# Altium PCB PCB3.PcbDoc
Units mil, origin at the board's own origin, x right, y up, seen from the top; angles counter-clockwise.
Board outline 6000 x 4000 mil, 4 copper layers (Top Layer 1, Top Layer, Bottom Layer, Bottom Layer 1), stack 23.756 mil thick; 8 components, 6 nets, 56 pads, 0 vias.
Unrouted connection lines stored in the file: 10.
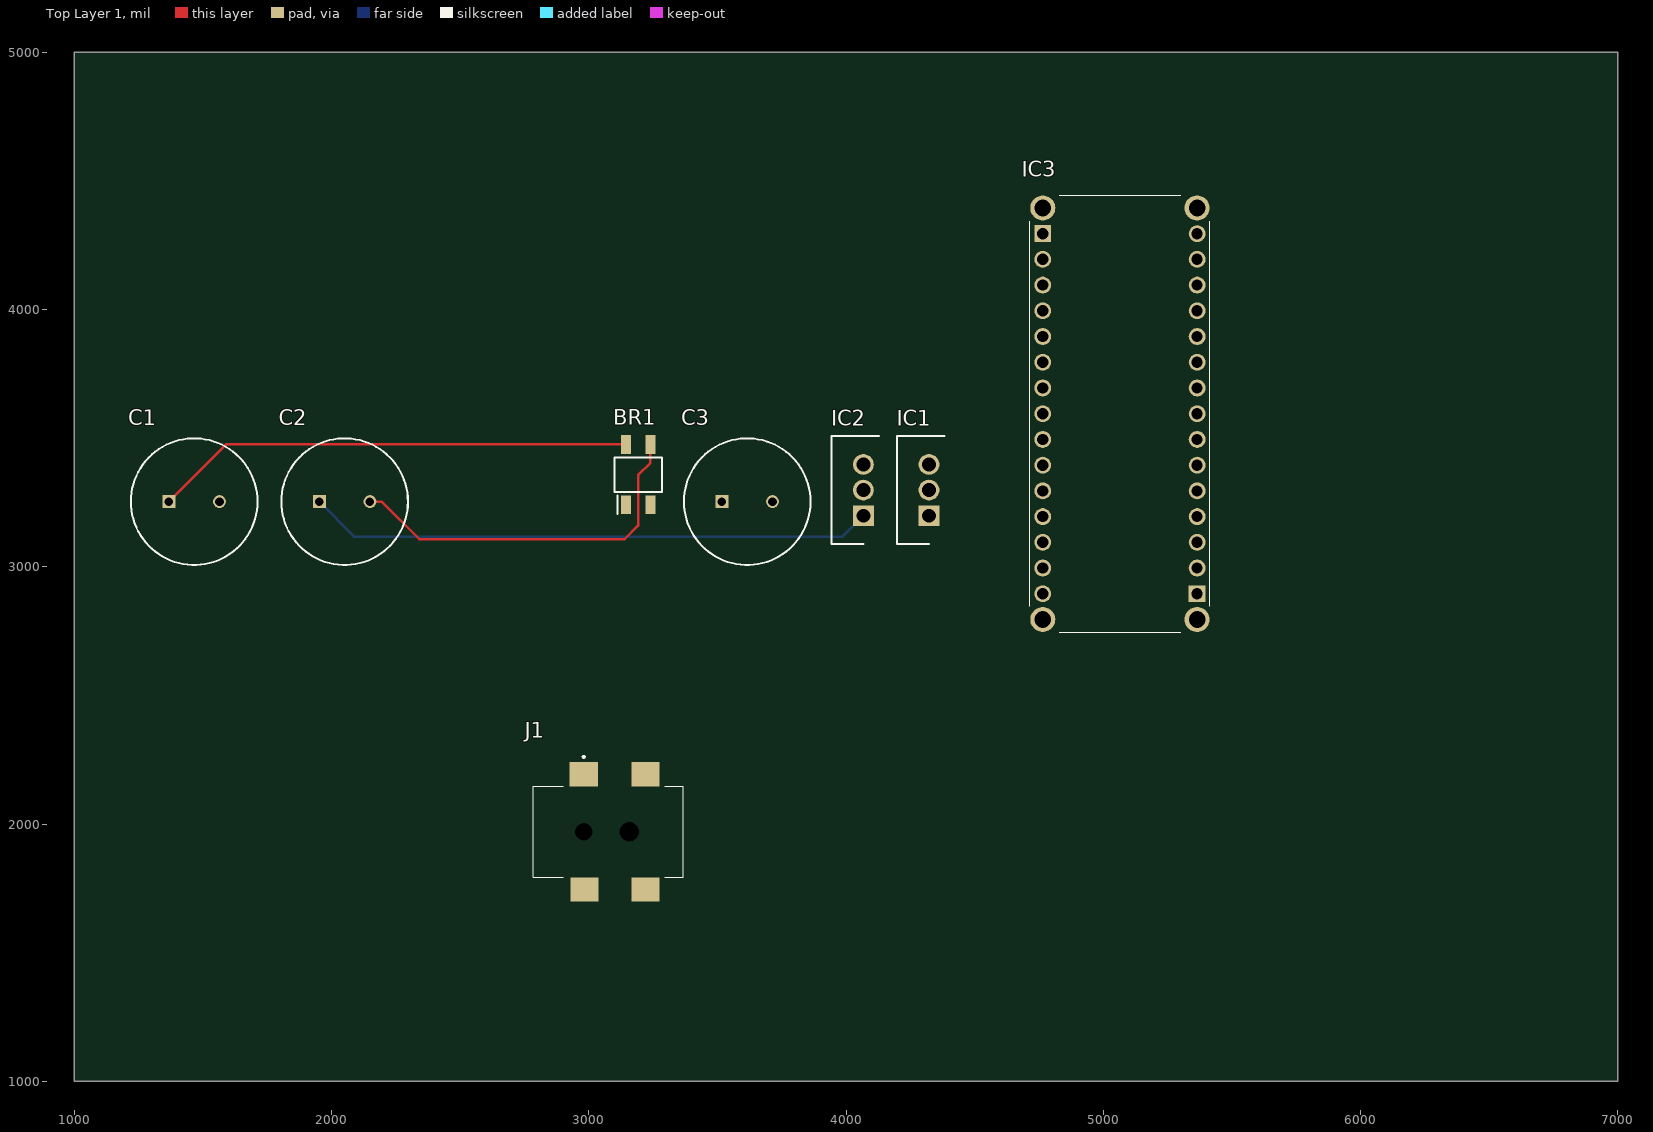
[diagram p0: Top Layer 1 view]
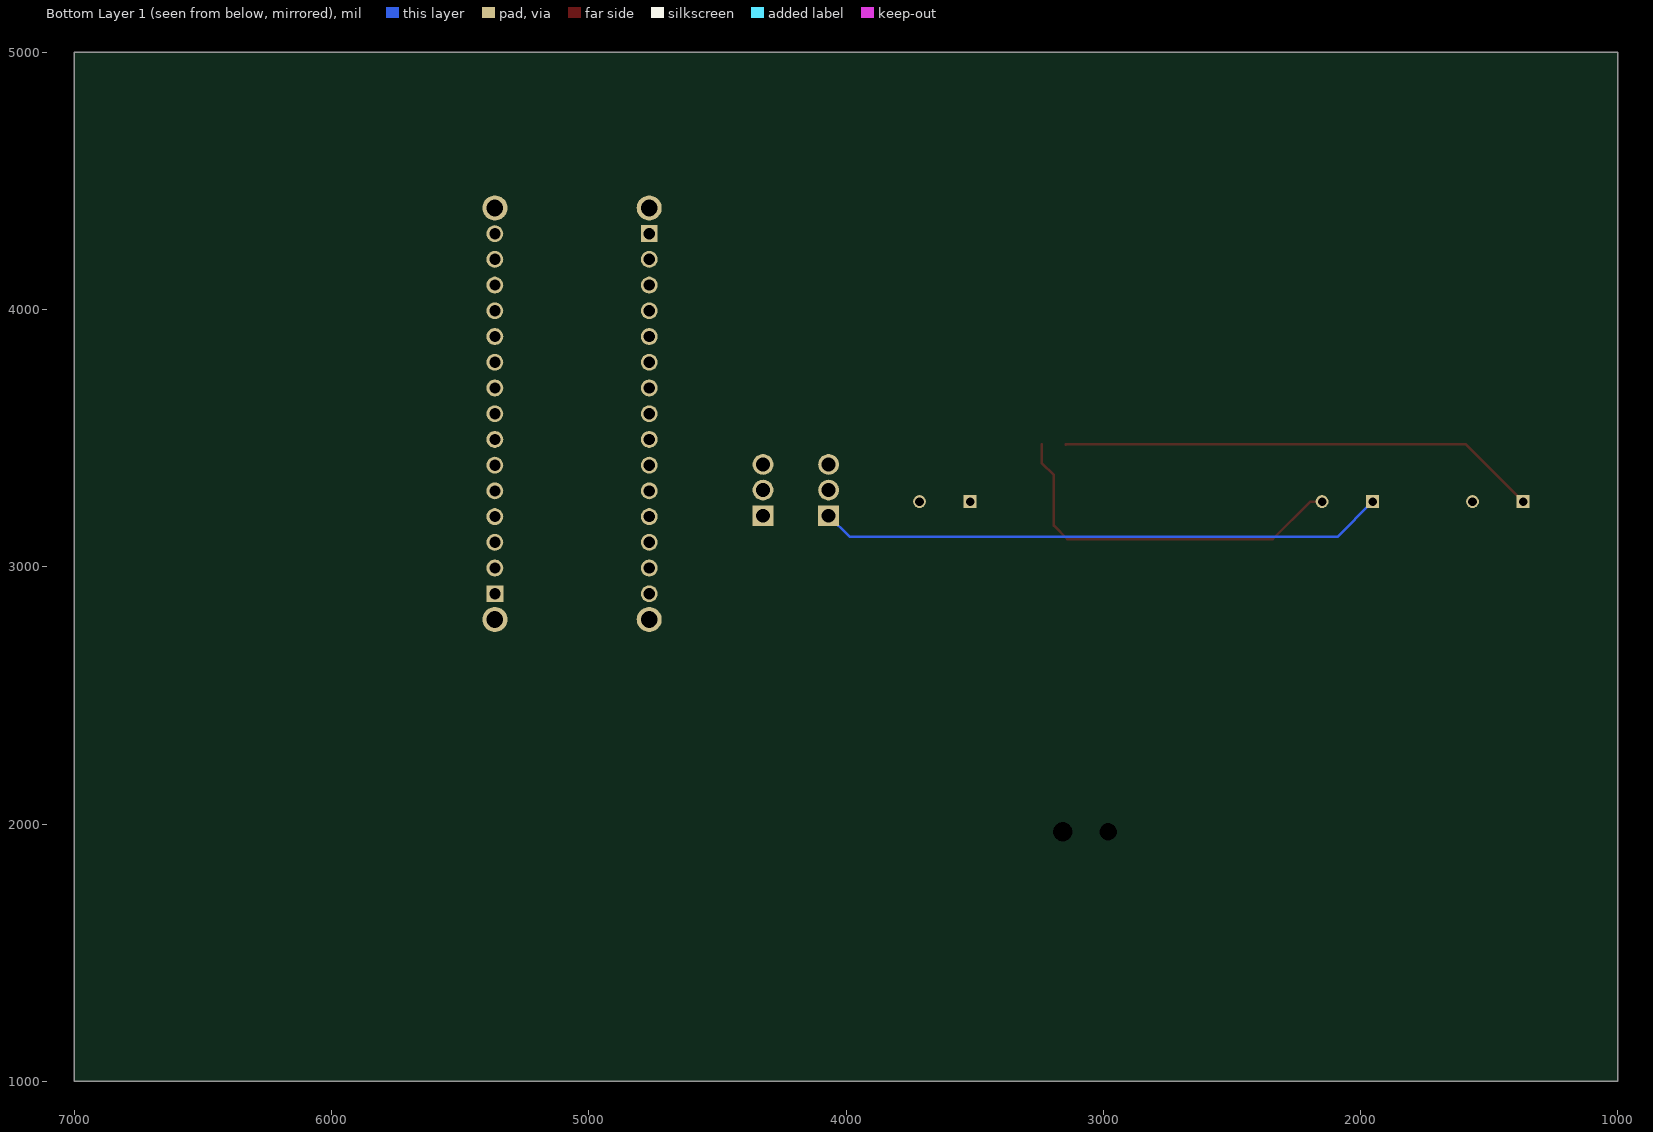
[diagram p1: Bottom Layer 1 view, seen from below]
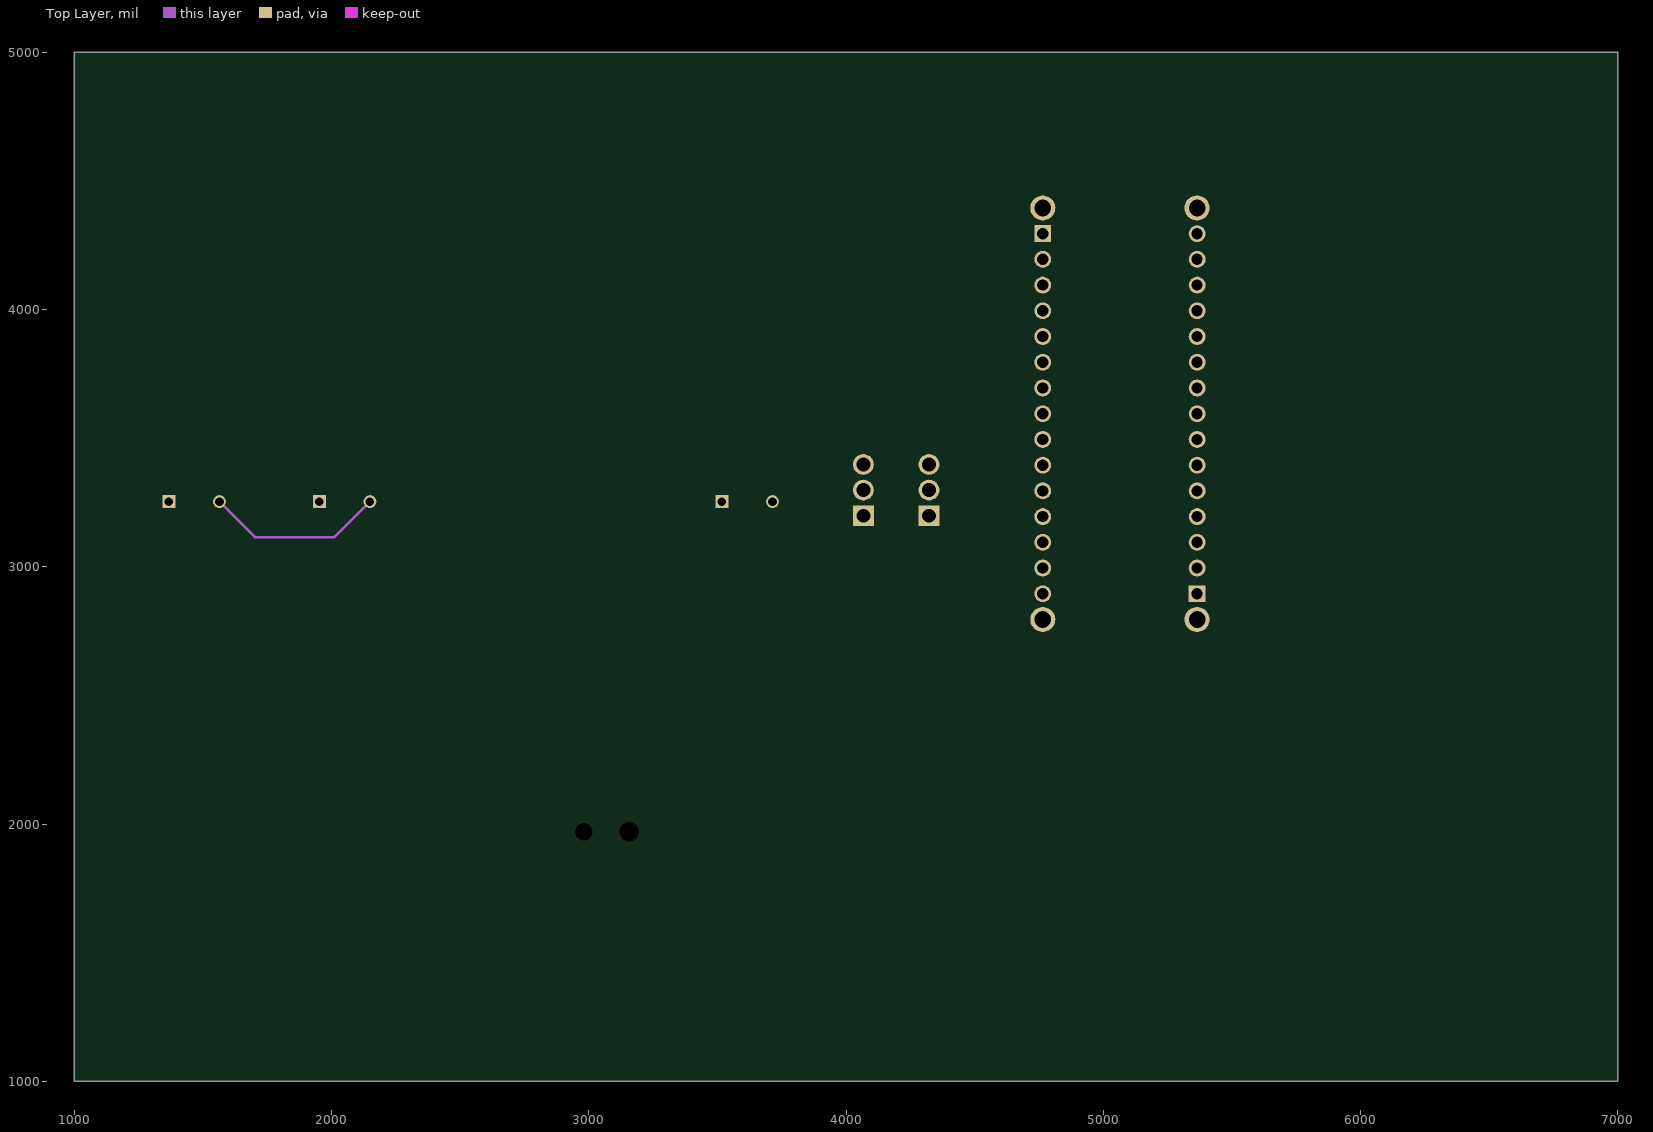
[diagram p2: Top Layer]

## Layer stack, top to bottom
Top Solder: solder mask 0.4, Solder Resist, Dk 3.5
Top Layer 1: signal copper 1.378
Dielectric 2: prepreg 2.8, PP-006, Dk 4.1
Top Layer: signal copper 1.4
Dielectric 1: dielectric 12.6, FR-4, Dk 4.8
Bottom Layer: signal copper 1.4
Dielectric 3: prepreg 2.8, PP-006, Dk 4.1
Bottom Layer 1: signal copper 1.378
Bottom Solder: solder mask 0.4, Solder Resist, Dk 3.5

## Board outline
1000,1000 7000,1000 7000,5000 1000,5000

## Design rules (kind name [scope] priority, off if disabled: settings)
Clearance [All] p1: gap=10 ignorepadtopadclearanceinfootprint=FALSE except(0: Arc-Hole Track-Hole SMDPad-Hole THPad-Hole Via-Hole Fill-Hole Poly-Hole Region-Hole Text-Hole)
PolygonConnect [All] p1: connectstyle=Relief reliefconductorwidth=10 reliefentries=4 polygonreliefangle="90 Angle" airgapwidth=10
RoutingVias [All] p1: holewidth=28 width=50 viastyle="Through Hole" minholewidth=28 minwidth=50 maxholewidth=28 maxwidth=50
SolderMaskExpansion [All] p1: expansion=4 istentingtop=FALSE
Width [All] p1: maxlimit=10 minlimit=10 preferedwidth=10
30 further rules are at their usual default settings.

## Classes and differential pairs
component class Sheet4: IC1
component class Sheet3: BR1 C1 C2 IC1 IC2 J1

## Components (designator, comment, footprint, x,y, rotation, side; value= is the part's Value field where it differs from the comment)
BR1 "MBS10_RC" SOP240P690X290-4N 3192.43,3358.24 r90 top
C1 "100uf" CAPPRD500W65D1250H2700 1367.43,3253.24 r0 top
C2 "100uf" CAPPRD500W65D1250H2700 1952.43,3253.24 r0 top
C3 "100uf" CAPPRD500W65D1250H2700 3517.43,3253.24 r0 top
IC1 "LM7812ACT" TO254P470X1016X2019-3P 4322.43,3198.24 r90 top
IC2 "LM7805ACT" TO254P470X1016X2019-3P 4067.43,3198.24 r90 top
IC3 "ABX00028" ABX00028 5365,2895 r90 top
J1 "PJ-002AH-SMT-1" PJ002AHSMT1 3075,2005 r0 top

## Footprints (in the part's own frame and the unit in brackets; to place one, negate y for a bottom-side part, rotate by r counter-clockwise, add the part's x,y. Pads: shape width x height; smd on the part's side, far side on the other; paste and mask are expansions set on the pad)
ABX00028 [mm]
  rect 1.665x1.665 hole 1.11: A1(0,0) B1(35.56,15.24)
  round 1.665 hole 1.11: A2(2.54,0) A3(5.08,0) A4(7.62,0) A5(10.16,0) A6(12.7,0) A7(15.24,0) A8(17.78,0) A9(20.32,0) A10(22.86,0) A11(25.4,0) A12(27.94,0) A13(30.48,0) A14(33.02,0) A15(35.56,0) B2(33.02,15.24) B3(30.48,15.24) B4(27.94,15.24) B5(25.4,15.24) B6(22.86,15.24) B7(20.32,15.24) B8(17.78,15.24) B9(15.24,15.24) B10(12.7,15.24) B11(10.16,15.24) B12(7.62,15.24) B13(5.08,15.24) B14(2.54,15.24) B15(0,15.24)
  round 2.475 hole 1.65: MH1(-2.54,0) MH2(-2.54,15.24) MH3(38.1,15.24) MH4(38.1,0)
  silkscreen extent -3.81,-1.27 39.37,16.51, body extent -4.94,-1.27 39.39,16.51, height 6
CAPPRD500W65D1250H2700 [mm]
  rect 1.275x1.275 hole 0.85: 1(0,0)
  round 1.275 hole 0.85: 2(5,0)
  silkscreen extent -3.75,-6.25 8.75,6.25, body extent -3.99,-6.5 9,6.5, height 27
PJ002AHSMT1 [mm]
  rect 2.8x2.4 smd: 1(-2.4,4.8) 2(-2.32,-6.6) 3(3.7,-6.6) 4(3.7,4.8)
  round 0.85 hole 1.7 unplated: 5(-2.4,-0.9)
  round 0.95 hole 1.9 unplated: 6(2.1,-0.9)
  silkscreen extent -7.4,-5.4 7.4,6.6, body extent -7.4,-7.31 7.4,5.29, height 11.21
SOP240P690X290-4N [mm]
  rect 1.85x1 smd: 1(-2.975,1.2) 2(-2.975,-1.2) 3(2.975,-1.2) 4(2.975,1.2)
  silkscreen extent -3.9,-2.35 1.7,2.35, body extent -3.45,-2.35 3.45,2.35, height 2.9
TO254P470X1016X2019-3P [mm]
  rect 2.055x2.055 hole 1.37: 1(0,0)
  round 2.055 hole 1.37: 2(2.535,0) 3(5.07,0)
  silkscreen extent -2.8,-1.55 7.87,3.15, body extent -2.55,-1.55 7.61,3.15, height 18.54

## Part data
BR1: "Bridge Rectifier", Arrow Part Number="MBS10 RC", Manufacturer_Name="Taiwan Semiconductor", Mouser Part Number=N/A, Arrow Price/Stock=https://www.arrow.com/en/products/mbs10rc/taiwan-semiconductor?region=nac, Height=2.9mm, Manufacturer_Part_Number="MBS10 RC", Mouser Price/Stock=https://www.mouser.com/Search/Refine.aspx?Keyword=N%2FA
C1 C2 C3: library part EEUTA1E102LB, "Capacitor Polarised", Manufacturer_Name=Panasonic, Datasheet Link=http://industrial.panasonic.com/cdbs/www-data/pdf/RDF0000/ABA0000C1212.pdf, Height=27mm, Manufacturer_Part_Number=EEUTA1E102LB
IC1: "Integrated Circuit", Manufacturer_Name=onsemi, Mouser Part Number=512-LM7812ACT, Arrow Part Number=LM7812ACT, Arrow Price/Stock=https://www.arrow.com/en/products/lm7812act/on-semiconductor, Datasheet Link=https://datasheet.datasheetarchive.com/originals/distributors/Datasheets_SAMA/704b005d7d2d9ced5864f40b6609c1bc.pdf, Height=4.7mm, Manufacturer_Part_Number=LM7812ACT, Mouser Price/Stock=https://www.mouser.com/Search/Refine.aspx?Keyword=512-LM7812ACT
IC2: "Integrated Circuit", Manufacturer_Name=onsemi, Mouser Part Number=512-LM7805ACT, Arrow Part Number=LM7805ACT, Arrow Price/Stock=https://www.arrow.com/en/products/lm7805act/on-semiconductor, Datasheet Link=https://componentsearchengine.com/Datasheets/2/LM7805ACT.pdf, Height=4.7mm, Manufacturer_Part_Number=LM7805ACT, Mouser Price/Stock=https://www.mouser.co.uk/ProductDetail/ON-Semiconductor-Fairchild/LM7805ACT?qs=VOMQJJE%252BBNlQknJDd4ZVLg%3D%3D
IC3: "Integrated Circuit", Manufacturer_Name=Arduino, Mouser Part Number=782-ABX00028, Arrow Part Number=ABX00028, Arrow Price/Stock=https://www.arrow.com/en/products/abx00028/arduino-corporation?region=nac, Datasheet Link=https://store.arduino.cc/arduino-nano-every, Height=10mm, Manufacturer_Part_Number=ABX00028, Mouser Price/Stock=https://www.mouser.co.uk/ProductDetail/Arduino/ABX00028?qs=PzGy0jfpSMtit6rnFl8mVg%3D%3D
J1: "Connector", Manufacturer_Name="CUI Devices", Mouser Part Number=N/A, Datasheet Link=https://www.cui.com/product/resource/pj-002ah-smt-tr.pdf, Height=11mm, Manufacturer_Part_Number=PJ-002AH-SMT-1, Mouser Price/Stock=https://www.mouser.co.uk/ProductDetail/CUI-Inc/PJ-002AH-SMT-1/?qs=WyjlAZoYn53v8l9vpJCO1Q%3D%3D

## Nets (pads, with @x,y where several pads share a name; then routed paths per layer and width w, separated by ;. In a path a pad name is that pad's centre, name@x,y a point inside that pad or via, vN(x,y) a via of type N, cw(c..) or ccw(c..) an arc to the next point about the centre after c; other vN are vias at no path point)
NetBR1_1: BR1.1 J1.1
NetBR1_2: BR1.2 J1.4
NetBR1_3: BR1.3 C1.2 C2.2 C3.2 IC1.2 IC2.2 IC3.A14 | length 2159.9
  Top Layer 1 w10: C2.2 2195,3253.24 2341.24,3107 3139,3107 3192,3160 3192,3356.32 3239.68,3404 BR1.3
  Top Layer w10: C1.2 1702.53,3115 2011.04,3115 C2.2
NetBR1_4: BR1.4 C1.1 IC1.1 | length 1870.7
  Top Layer 1 w10: C1.1 1590.19,3476 3145.19,3476 BR1.4
NetC2_1: C2.1 IC1.3 IC2.1 | length 2205.9
  Bottom Layer 1 w10: C2.1 2089.68,3116 3985.19,3116 IC2.1
NetC3_1: C3.1 IC2.3 IC3.B4
pads on no net: IC3.A1 IC3.A2 IC3.A3 IC3.A4 IC3.A5 IC3.A6 IC3.A7 IC3.A8 IC3.A9 IC3.A10 IC3.A11 IC3.A12 IC3.A13 IC3.A15 IC3.B1 IC3.B2 IC3.B3 IC3.B5 IC3.B6 IC3.B7 IC3.B8 IC3.B9 IC3.B10 IC3.B11 IC3.B12 IC3.B13 IC3.B14 IC3.B15 IC3.MH1 IC3.MH2 IC3.MH3 IC3.MH4 J1.2 J1.3 J1.5 J1.6